# Altium PCB ESP32_RelayControl.pcbdoc (part 2 of 2)
Units mil, origin at the board's own origin, x right, y up, seen from the top; angles counter-clockwise.
Board outline 4712.62 x 5124.54 mil, 4 copper layers (Top Layer, GND, Power, Bottom Layer); 107 components, 102 nets, 393 pads, 226 vias.
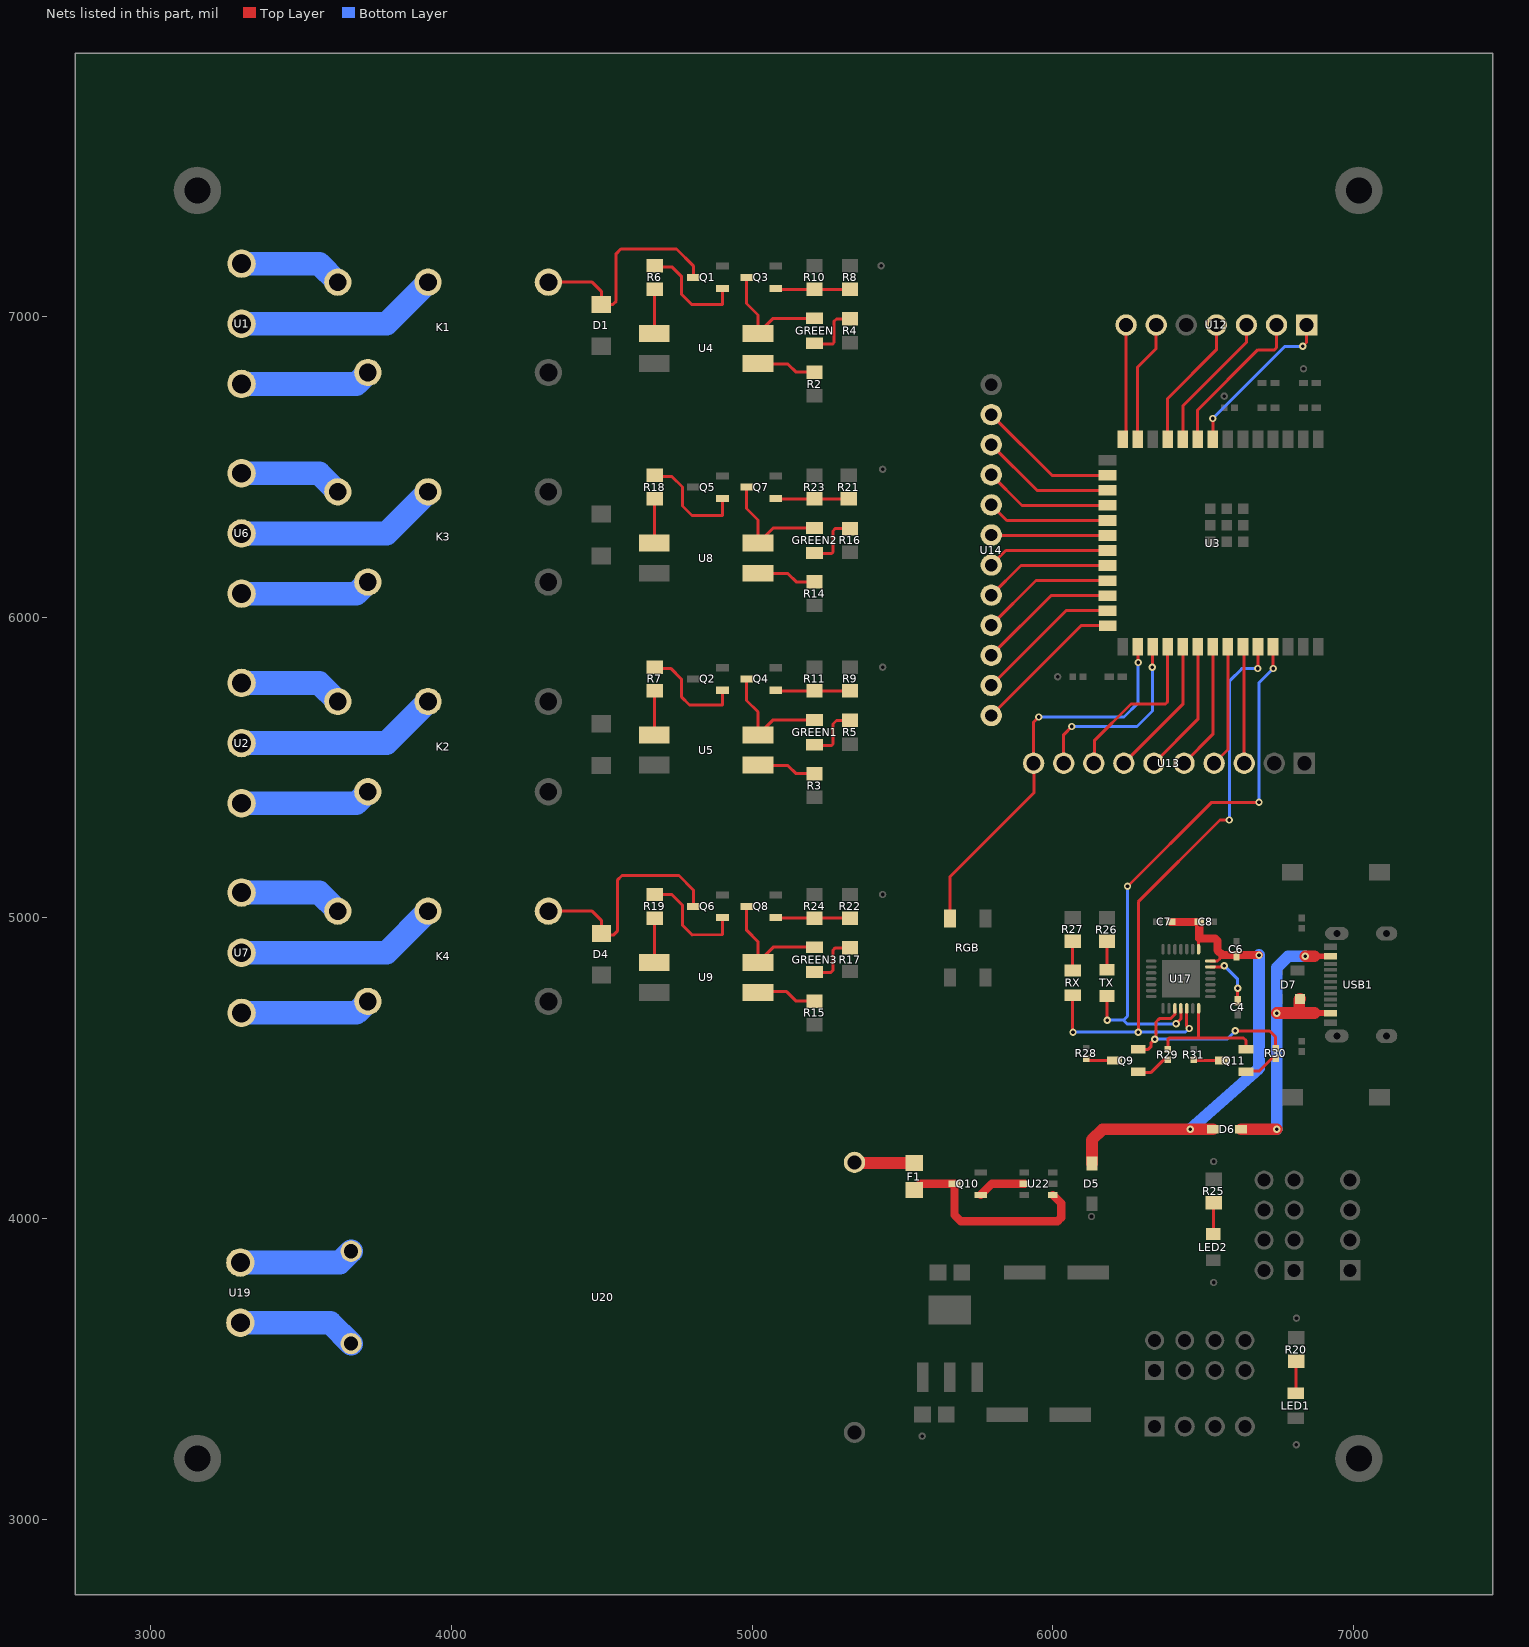
[diagram p4: the nets of this part, all layers, seen from the top]

## Via types
v1: diameter 24.41, hole 12.2, Top Layer to Bottom Layer, 140 vias
v2: diameter 24.02, hole 12.01, Top Layer to Bottom Layer, 86 vias

## Nets (pads, with @x,y where several pads share a name; then routed paths per layer and width w, separated by ;. In a path a pad name is that pad's centre, name@x,y a point inside that pad or via, vN(x,y) a via of type N, cw(c..) or ccw(c..) an arc to the next point about the centre after c; other vN are vias at no path point) (continued)
GPIO9: U3.17 U14.3 | length 448.8
  Top Layer w10: U14.3@5795.27,6572.96 5946.95,6421.29 U3.17@6181.29,6421.28
GPIO10: U3.18 U14.4 | length 428.1
  Top Layer w10: U14.4@5795.27,6472.96 5896.95,6371.29 U3.18@6181.29,6371.28
GPIO11: U3.19 U14.5 | length 407.4
  Top Layer w10: U14.5@5795.27,6372.96 5846.95,6321.29 U3.19@6181.29,6321.28
GPIO12: U3.20 U14.6 | length 386.7
  Top Layer w10: U14.6@5795.27,6272.96 5796.95,6271.29 U3.20@6181.29,6271.28
GPIO13: U3.21 U14.7 | length 406
  Top Layer w10: U14.7@5795.27,6172.96 5843.59,6221.29 U3.21@6181.29,6221.28
GPIO14: U3.22 U14.8 | length 426.7
  Top Layer w10: U14.8@5795.27,6072.96 5893.59,6171.29 U3.22@6181.29,6171.28
GPIO15: U3.8 U12.1 | length 544.1
  Top Layer w10: v1(6531.49,6659.97) 6531.49,6590.96 U3.8@6531.68,6590.77 ; v1(6830.7,6900.12) 6843.3,6912.73 U12.1@6843.3,6970.99
  Bottom Layer w10: v1(6531.49,6659.97) 6771.65,6900.13 v1(6830.7,6900.12)
GPIO16: U3.9 U12.2 | length 522
  Top Layer w10: U3.9@6481.68,6590.77 6480.31,6592.14 6480.31,6687.53 6681.1,6888.32 6736.21,6888.32 6743.3,6895.4 U12.2@6743.3,6970.99
GPIO17: U3.10 U12.3 | length 467.9
  Top Layer w10: U3.10@6431.68,6590.77 6431.68,6701.89 6643.3,6913.51 U12.3@6643.3,6970.99
GPIO18: U3.11 U12.4 | length 447.2
  Top Layer w10: U3.11@6381.68,6590.77 6381.68,6726.7 6543.3,6888.32 U12.4@6543.3,6970.99
GPIO19: U3.13 U12.6 | length 405.8
  Top Layer w10: U3.13@6281.68,6590.77 6281.68,6831.42 6343.3,6893.04 U12.6@6343.3,6970.99
GPIO20: U3.14 U12.7 | length 385
  Top Layer w10: U3.14@6231.68,6590.77 6243.3,6602.39 U12.7@6243.3,6970.99
GPIO21: U3.23 U14.9 | length 447.5
  Top Layer w10: U14.9@5795.27,5972.96 5943.59,6121.29 U3.23@6181.29,6121.28
GPIO35: RGB.4 U3.28 U13.10 | length 1330.3
  Top Layer w10: RGB.4@5657.48,4998.55 5657.48,5136.36 5937,5415.88 5937,5513.12 U13.10@5935.82,5514.3 5935.82,5650.92 v1(5952.75,5667.84) ; U3.28@6281.68,5901.79 6283.46,5900.02 v1(6283.46,5848.94)
  Bottom Layer w10: v1(5952.75,5667.84) 6236.21,5667.85 6283.46,5715.09 v1(6283.46,5848.94)
GPIO36: U3.29 U13.9 | length 636.9
  Top Layer w10: U13.9@6035.82,5514.3 6035.82,5609.19 v1(6062.99,5636.35) ; v1(6330.7,5833.2) 6330.7,5900.82 U3.29@6331.68,5901.79
  Bottom Layer w10: v1(6062.99,5636.35) 6279.52,5636.35 6330.7,5687.53 v1(6330.7,5833.2)
GPIO37: U3.30 U13.8 | length 556.2
  Top Layer w10: U13.8@6135.82,5514.3 6137.79,5516.27 6137.79,5589.11 6259.84,5711.15 6374.01,5711.15 6381.68,5718.83 U3.30@6381.68,5901.79
GPIO38: U3.31 U13.7 | length 468.6
  Top Layer w10: U13.7@6235.82,5514.3 6431.68,5710.16 U3.31@6431.68,5901.79
GPIO39: U3.32 U13.6 | length 447.9
  Top Layer w10: U13.6@6335.82,5514.3 6481.68,5660.16 U3.32@6481.68,5901.79
GPIO40: U3.33 U13.5 | length 427.2
  Top Layer w10: U13.5@6435.82,5514.3 6531.68,5610.16 U3.33@6531.68,5901.79
GPIO41: U3.34 U13.4 | length 406.5
  Top Layer w10: U13.4@6535.82,5514.3 6581.68,5560.16 U3.34@6581.68,5901.79
GPIO42: U3.35 U13.3 | length 389.2
  Top Layer w10: U3.35@6631.68,5901.79 6635.82,5897.66 U13.3@6635.82,5514.3
GPIO45: U3.26 U14.12 | length 510.8
  Top Layer w10: U14.12@5795.27,5672.96 6093.59,5971.29 U3.26@6182.47,5971.28
GPIO46: U3.16 U14.2 | length 469.6
  Top Layer w10: U14.2@5795.27,6672.96 5996.95,6471.29 U3.16@6181.29,6471.28
GPIO47: U3.24 U14.10 | length 468.2
  Top Layer w10: U14.10@5795.27,5872.96 5993.59,6071.29 U3.24@6181.29,6071.28
GPIO48: U3.25 U14.11 | length 488.9
  Top Layer w10: U14.11@5795.27,5772.96 6043.59,6021.29 U3.25@6181.29,6021.28
GREEN1_1: GREEN1.1 R5.1 | length 192.3
  Top Layer w10: GREEN1.1@5207.68,5575.81 5209.58,5573.91 5264.74,5573.91 5268.68,5577.85 5268.68,5644.78 5280.44,5656.53 R5.1@5325.73,5656.53
GREEN1_2: GREEN1.2 Q4.3 U5.2 | length 410.6
  Top Layer w10: Q4.3@4981.91,5794.36 4981.91,5722.89 5019.86,5684.93 U5.2@5019.86,5608.16 5070.21,5658.51 GREEN1.2@5207.68,5658.51
GREEN2_1: GREEN2.1 R16.1 | length 194.6
  Top Layer w10: GREEN2.1@5207.68,6213.6 5209.58,6211.7 5264.74,6211.7 5268.68,6215.64 5268.68,6286.51 5276.5,6294.32 R16.1@5325.73,6294.32
GREEN2_2: GREEN2.2 Q7.3 U8.2 | length 410.9
  Top Layer w10: Q7.3@4981.95,6432.13 4981.25,6361.33 5019.85,6322.74 5019.85,6245.93 5070.21,6296.3 GREEN2.2@5207.68,6296.3
K1_1: D1.2 K1.1 Q1.3 | length 768.3
  Top Layer w10: K1.1@4322.98,7113.16 4468.5,7113.15 4499,7082.65 D1.2@4499,7039.17 4537.1,7039.17 4548.21,7050.28 4548.21,7207.76 4563.96,7223.51 4749,7223.51 4804.71,7167.8 Q1.3@4804.71,7129
K1_2: K1.2 U1.2 | length 677.1
  Bottom Layer w78.74: U1.2@3303.15,6974.94 3784.74,6974.93 K1.2@3922.98,7113.16
K1_3: K1.3 U1.3 | length 345.4
  Bottom Layer w78.74: U1.3@3303.15,7174.94 3561.2,7174.93 K1.3@3622.98,7113.16
K1_4: K1.4 U1.1 | length 435.7
  Bottom Layer w78.74: U1.1@3303.15,6774.94 3684.74,6774.93 K1.4@3722.98,6813.16
K2_2: K2.2 U2.2 | length 677
  Bottom Layer w78.74: U2.2@3303.15,5581.24 3784.71,5581.23 K2.2@3922.94,5719.46
K2_3: K2.3 U2.3 | length 345.4
  Bottom Layer w78.74: U2.3@3303.15,5781.24 3561.17,5781.23 K2.3@3622.94,5719.46
K2_4: K2.4 U2.1 | length 435.6
  Bottom Layer w78.74: U2.1@3303.15,5381.24 3684.71,5381.23 K2.4@3722.94,5419.46
K3_2: K3.2 U6.2 | length 677
  Bottom Layer w78.74: U6.2@3303.15,6278.09 3784.71,6278.08 K3.2@3922.94,6416.31
K3_3: K3.3 U6.3 | length 345.4
  Bottom Layer w78.74: U6.3@3303.15,6478.09 3561.17,6478.08 K3.3@3622.94,6416.31
K3_4: K3.4 U6.1 | length 435.6
  Bottom Layer w78.74: U6.1@3303.15,6078.09 3684.71,6078.08 K3.4@3722.94,6116.31
K4_1: D4.2 K4.1 Q6.3 | length 794.8
  Top Layer w10: K4.1@4322.98,5022.62 4468.5,5022.61 4499.06,4992.05 ; 4499.06,4991.66 4499.06,4948.27 D4.2@4503.74,4943.59 ; D4.2@4503.74,4943.99 4540.34,4943.99 4552.15,4955.8 4552.15,5125.09 4567.9,5140.84 4756.87,5140.84 4804.74,5092.97 Q6.3@4804.74,5038.5
K4_2: K4.2 U7.2 | length 677.1
  Bottom Layer w78.74: U7.2@3303.15,4884.39 3784.74,4884.38 K4.2@3922.98,5022.62
K4_3: K4.3 U7.3 | length 345.4
  Bottom Layer w78.74: U7.3@3303.15,5084.39 3561.2,5084.38 K4.3@3622.98,5022.62
K4_4: K4.4 U7.1 | length 435.7
  Bottom Layer w78.74: U7.1@3303.15,4684.39 3684.74,4684.38 K4.4@3722.98,4722.62
LED2_2: LED2.2 R25.2 | length 104.5
  Top Layer w10: LED2.2@6533.21,3948.92 6533.21,4051.34 R25.2@6534.68,4052.8
Q1_1: Q1.1 R6.1 | length 366.7
  Top Layer w10: R6.1@4676.15,7168.36 4680.05,7164.46 4733.25,7164.46 4764.75,7132.96 4764.75,7073.86 4800.15,7038.46 4901.95,7039.06 Q1.1@4901.96,7091.6
Q3_1: Q3.1 R8.1 R10.2 | length 247.4
  Top Layer w10: Q3.1@5079.13,7091.6 5081.09,7089.63 R10.2@5207.63,7089.63 R8.1@5325.73,7089.63
Q6_1: Q6.1 R19.1 | length 377
  Top Layer w10: R19.1@4676.16,5077.85 4733.25,5077.8 4768.65,5042.4 4768.65,4975.5 4800.15,4944 4901.95,4944.5 Q6.1@4901.99,5001.1
Q8_1: Q8.1 R22.1 R24.2 | length 247.4
  Top Layer w10: Q8.1@5079.19,5001.07 5081.16,4999.11 R24.2@5207.66,4999.11 R22.1@5325.76,4999.1
Q9_1: Q9.1 R29.2 | length 116.6
  Top Layer w10: Q9.1@6283.46,4488.69 6285.4,4486.75 6326.77,4486.75 6368.78,4528.76 R29.2@6381.88,4528.76
Q9_3: Q9.3 R28.1 | length 97.2
  Top Layer w10: R28.1@6110.23,4532.69 6116.84,4526.09 Q9.3@6204.72,4526.09
Q11_1: Q11.1 R30.2 | length 116.7
  Top Layer w10: Q11.1@6641.72,4488.69 6643.72,4490.68 6685.03,4490.68 6727.1,4532.75 R30.2@6740.15,4532.74
Q11_3: Q11.3 R31.1 | length 95.6
  Top Layer w10: R31.1@6468.5,4528.76 6471.16,4526.09 Q11.3@6562.98,4526.09
R3_1: R3.1 U5.1 | length 199.7
  Top Layer w10: U5.1@5019.86,5508.16 5021.04,5506.98 5119.07,5506.98 5146.62,5479.43 R3.1@5207.63,5479.43
R4_1: GREEN.1 R4.1 | length 194.6
  Top Layer w10: GREEN.1@5207.66,6910.49 5209.61,6908.55 5268.68,6908.55 5272.62,6912.49 5272.62,6983.36 5280.44,6991.17 R4.1@5325.73,6991.17
R7_1: Q2.1 R7.1 | length 361.2
  Top Layer w10: R7.1@4676.15,5833.73 4680.05,5829.83 4729.35,5829.83 4764.75,5794.42 4764.75,5735.33 4792.35,5707.73 4901.95,5708.33 Q2.1@4901.95,5756.92
R7_2: R7.2 U5.3 | length 147.4
  Top Layer w10: U5.3@4674.95,5607.73 R7.2@4674.95,5753.43 ; R7.2@4674.95,5753.83 R7.2@4676.15,5755.03
R11_2: Q4.1 R9.1 R11.2 | length 247.4
  Top Layer w10: Q4.1@5079.16,5756.96 5081.13,5754.99 R11.2@5207.63,5754.99 R9.1@5325.73,5754.99
R14_1: R14.1 U8.1 | length 199.7
  Top Layer w10: U8.1@5019.86,6145.95 5021.04,6144.77 5119.07,6144.77 5146.62,6117.22 R14.1@5207.63,6117.22
R17_1: GREEN3.1 R17.1 | length 192.4
  Top Layer w10: GREEN3.1@5207.69,4819.99 5209.68,4818 5260.81,4818 5268.68,4825.88 5268.68,4892.81 5276.62,4900.75 R17.1@5325.76,4900.75
R18_1: Q5.1 R18.1 | length 374.6
  Top Layer w10: R18.1@4676.15,6471.53 4680.05,6467.64 4733.25,6467.64 4768.65,6432.13 4768.65,6369.13 4800.15,6337.74 4901.95,6338.23 Q5.1@4901.96,6394.75
R18_2: R18.2 U8.3 | length 147.3
  Top Layer w10: U8.3@4674.98,6245.95 4674.98,6391.64 R18.2@4676.13,6392.78
R20_2: LED1.1 R20.2 | length 106.5
  Top Layer w10: LED1.1@6807.23,3419.98 6807.23,3524.3 R20.2@6808.76,3525.84
R23_2: Q7.1 R21.1 R23.2 | length 243.5
  Top Layer w10: Q7.1@5079.16,6394.75 5081.13,6392.78 R23.2@5207.63,6392.78 R21.1@5321.83,6392.78
RX_1: R27.2 RX.1 | length 96.5
  Top Layer w10: RX.1@6065.52,4825.75 R27.2@6065.5,4922.24
TX_2: R26.2 TX.2 | length 94.5
  Top Layer w10: TX.2@6179.71,4827.66 R26.2@6179.69,4922.2
U4_1: R2.1 U4.1 | length 199.7
  Top Layer w10: U4.1@5019.86,6842.8 5021.04,6841.62 5119.07,6841.62 5146.62,6814.07 R2.1@5207.63,6814.07
U4_2: GREEN.2 Q3.3 U4.2 | length 410.6
  Top Layer w10: Q3.3@4981.88,7129 4981.88,7042.41 5019.86,7004.42 U4.2@5019.86,6942.8 5070.25,6993.19 GREEN.2@5207.66,6993.19
U4_3: R6.2 U4.3 | length 147.3
  Top Layer w10: U4.3@4674.98,6942.8 4674.98,7088.49 R6.2@4676.13,7089.63
U9_1: R15.1 U9.1 | length 202
  Top Layer w10: U9.1@5019.86,4752.25 5022.62,4755.01 5115.14,4755.01 5146.6,4723.54 R15.1@5207.66,4723.55
U9_2: GREEN3.2 Q8.3 U9.2 | length 410.6
  Top Layer w10: Q8.3@4981.95,5038.49 4981.95,4959.1 5019.85,4921.19 U9.2@5019.86,4852.25 ; U9.2@5019.86,4852.25 5070.29,4902.69 GREEN3.2@5207.69,4902.69
U9_3: R19.2 U9.3 | length 147.3
  Top Layer w10: U9.3@4674.98,4852.25 4674.98,4997.93 R19.2@4676.16,4999.11
U17_6: C4.2 U17.6 | length 182.5
  Top Layer w10: U17.6@6523.59,4837.14 6565.74,4837.14 v1(6569.68,4841.07) ; C4.2@6614.17,4724.69 v1(6614.17,4766.27)
  Bottom Layer w10: v1(6569.68,4841.07) 6614.16,4796.59 v1(6614.17,4766.27)
U19_1: U19.1 U20.2 | length 392.9
  Bottom Layer w78.74: U19.1@3303.15,3654.46 3598.03,3654.46 U20.2@3667.32,3585.17
U19_2: U19.2 U20.1 | length 379.8
  Bottom Layer w78.74: U19.2@3303.15,3854.47 3629.52,3854.47 U20.1@3667.32,3892.26
U20_3: F1.1 U20.3 | length 199.8
  Top Layer w39.37: U20.3@5340.55,4187.53 5342.82,4185.27 F1.1@5539.37,4185.27
U22_1: F1.2 Q10.3 U22.1 | length 702.1
  Top Layer w27.56: F1.2@5539.37,4095.31 5560.73,4116.66 Q10.3@5673.17,4116.66 5673.17,4012.39 5694.09,3991.47 6015.35,3991.47 6027.55,4003.68 6027.55,4051.71 U22.1@5999.95,4079.31
U22_5: Q10.1 U22.5 | length 161.1
  Top Layer w27.56: Q10.1@5759.89,4079.26 5797.34,4116.71 U22.5@5905.46,4116.71
UORXD: RX.2 U3.36 U17.26 | length 2082.3
  Top Layer w10: RX.2@6065.52,4743.05 6065.52,4622.01 v1(6066.92,4620.6) ; v1(6283.74,4620.6) 6283.74,5053.56 6555.5,5325.33 v1(6586.61,5325.32) ; U17.26@6444.87,4699.32 6444.87,4640.3 v1(6452.75,4632.41) ; v1(6681.1,5829.26) 6681.1,5901.22 U3.36@6681.68,5901.79
  Bottom Layer w10: v1(6066.92,4620.6) v1(6283.74,4620.6) 6440.94,4620.6 v1@6452.75,4632.42 ; v1(6586.61,5325.32) 6586.61,5786.35 6629.52,5829.26 ; 6626.37,5829.26 6629.52,5829.26 ; v1(6681.1,5829.26) 6630.31,5829.26 6630.11,5829.46 ; 6629.52,5829.26 6630.11,5829.46 ; 6629.52,5829.26 6629.91,5829.26 6630.11,5829.46
UOTXD: TX.1 U3.37 U17.25 | length 1912.9
  Top Layer w10: TX.1@6179.71,4741.04 6179.71,4661.37 v1(6181.1,4659.97) ; v1(6248.03,5104.85) 6527.55,5384.38 v1(6685.03,5384.38) ; v1(6409.44,4648.16) 6425.17,4663.9 U17.25@6425.17,4699.32 ; U3.37@6731.68,5901.79 v1@6732.3,5829.21
  Bottom Layer w10: v1(6181.1,4659.97) 6234.45,4659.98 ; v1(6248.03,5104.85) 6248.02,4673.55 6234.45,4659.98 ; v1(6409.44,4648.16) 6246.26,4648.16 6234.45,4659.98 ; v1(6685.03,5384.38) 6685.03,5782.02 v1(6732.28,5829.26)
USB_DTR: Q11.2 R29.1 U17.28 | length 426.9
  Top Layer w10: R29.1@6381.88,4562.85 6381.88,4596.98 6385.82,4600.92 ; 6385.82,4600.53 6484.2,4600.53 ; U17.28@6484.3,4698.95 6484.2,4600.53 ; 6633.85,4600.53 6484.2,4600.53 ; 6633.85,4600.92 6641.73,4593.05 Q11.2@6641.72,4563.49
USB_RTS: Q9.2 R30.1 U17.24 | length 687
  Top Layer w10: Q9.2@6283.46,4563.49 6316.9,4563.49 6326.77,4573.36 6326.77,4585.17 v1(6338.58,4596.98) 6342.51,4600.92 6342.51,4654.06 6353.54,4665.09 6390.93,4665.09 6405.47,4679.63 U17.24@6405.47,4699.32 ; v1(6606.29,4624.54) 6720.47,4624.54 6740.15,4604.86 R30.1@6740.15,4566.82
  Bottom Layer w10: v1(6338.58,4596.98) 6578.73,4596.98 v1(6606.29,4624.54)
VBUS: D6.2 D7.4 USB1.2 USB1.11 | length 1076.3
  Top Layer w19.68: 6870.07,4683.6 USB1.2@6922.23,4683.6 ; 6870.1,4872.61 USB1.11@6922.23,4872.58
  Top Layer w39.37: D6.2@6624.9,4297.77 v1(6744.09,4297.77) ; v1(6744.09,4683.6) 6818.65,4683.6 6818.89,4683.36 ; 6818.89,4683.2 6818.89,4683.36 ; 6818.89,4683.59 6870.07,4683.6 ; D7.4@6818.89,4728.46 6818.89,4683.36 ; D7.4@6818.89,4729.24 D7.4@6820.86,4731.21 ; v1(6838.58,4872.57) 6870.07,4872.57
  Bottom Layer w39.37: v1(6744.09,4297.77) v1(6744.09,4683.6) 6744.09,4834.78 6781.92,4872.61 v1(6838.58,4872.57)
VDDUSB: C6.2 C7.2 C8.2 D5.2 D6.1 U17.7 U17.8 | length 1639.1
  Top Layer w10: 6484.24,4923.75 U17.8@6484.27,4896.17 ; U17.7@6523.59,4856.84 6547.2,4856.81 6555.1,4864.61 6555.1,4872.61
  Top Layer w27.56: C7.2@6391.53,4986.7 C8.2@6486.42,4986.7 6486.41,4931.63 6539.36,4931.63 6547.24,4923.75 6547.24,4892.26 6562.98,4876.51 6608.41,4876.51 C6.2@6610.23,4874.69 6612.06,4876.51 v1(6685.03,4876.51)
  Top Layer w39.37: D5.2@6129.92,4183.59 6129.91,4262.34 6165.35,4297.77 v1(6456.69,4297.77) D6.1@6532.57,4297.77
  Bottom Layer w39.37: v1(6456.69,4297.77) 6685.03,4500.3 v1(6685.03,4876.51)
pads on no net: RGB.2 U17.1 U17.2 U17.9 U17.10 U17.11 U17.12 U17.13 U17.14 U17.15 U17.16 U17.17 U17.18 U17.19 U17.20 U17.21 U17.22 U17.23 U17.27 U17.29 U21.2 U22.4 USB1.3 USB1.9 USB1.13 USB1.14 USB1.15 USB1.16
copper on no net:
  other v1: 3156.3,3142.26 7016.92,3142.26 3113.15,3160.13 3199.45,3160.13 6973.77,3160.13 7060.07,3160.13 3095.28,3203.28 3217.32,3203.28 6955.9,3203.28 7077.94,3203.28 3113.15,3246.43 3199.45,3246.43 6973.77,3246.43 7060.07,3246.43 3156.3,3264.3 7016.92,3264.3 6550.19,6250.21 6605.31,6250.21 6522.63,6277.77 6577.75,6277.77 6632.87,6277.77 6550.19,6305.33 6605.31,6305.33 6522.63,6332.89 6577.75,6332.89 6632.87,6332.89 6550.19,6360.45 6605.31,6360.45 3156.3,7357.21 7016.92,7357.21 3113.15,7375.08 3199.45,7375.08 6973.77,7375.08 7060.07,7375.08 3095.28,7418.23 3217.32,7418.23 6955.9,7418.23 7077.94,7418.23 3113.15,7461.38 3199.45,7461.38 6973.77,7461.38 7060.07,7461.38 3156.3,7479.25 7016.92,7479.25

## Polygon pours and split planes (outlines as drawn)
GND on GND (solid): 7204.72,3034.08 4394.98,3034.08 4394.98,7624.54 7204.72,7624.54
+5V on Power (solid): 4396.46,4328.48 4396.46,7623.2 4764.69,7623.2 4766.53,4470.21 4766.53,4419.03 6179.92,4419.03 6179.52,3966.67 5835.43,3967.46 5490.55,3966.67 5487.79,3963.91 5487.01,3576.51 5597.24,3576.51 5597.24,3269.43 5762.6,3269.43 5766.53,3273.36 5766.53,3375.73 5762.6,3379.66 5935.82,3379.66 5935.82,3174.94 5931.89,3171 6250.78,3171 6251.96,3709.19 6883.85,3705.65 6880.09,3033.98 5439.76,3033.98 5439.76,4324.54 5435.82,4328.48
GND on Top Layer (solid, pour order 4): 6488.18,6396.19 6665.35,6396.19 6665.35,6305.64 6665.35,6219.03 6578.73,6219.03 6488.18,6219.03 6488.18,6301.7
3V3 on Power (solid): 7204.84,3746.59 6169.28,3746.59 6169.28,3628.48 5519.68,3628.48 5519.68,3939.5 6216.53,3935.57 6216.53,4459.19 5082.67,4459.19 5082.67,7624.54 7204.72,7624.54 7204.72,6400.13 6483.56,6400.13 6483.56,6214.24 7204.84,6214.24

## Keep-outs
Board Outline Layer:
  lines w10: 3000,3204.46 ccw(c3157.48,3204.46) 3157.48,3046.98 7015.75,3046.98 ccw(c7015.75,3204.46) 7173.23,3204.46 7173.23,5300.68 6938.01,5300.68 6938.01,7191.44 7173.23,7191.44 7173.23,7417.06 ccw(c7015.75,7417.06) 7015.75,7574.54 3157.48,7574.54 ccw(c3157.48,7417.06) 3000,7417.06 3000,3204.46
Multi-Layer:
  region: 3098.22,3774.15 3909.24,3772.18 3909.14,3732.81 3098.12,3734.78
  region: 3090.55,6860.76 3421.07,6860.76 3469.39,6909.08 3476.35,6911.96 3716.45,6911.96 3721.51,6910.56 3839.7,6839.69 3844.49,6831.25 3844.49,6717.07 3824.8,6717.07 3824.8,6825.67 3713.73,6892.27 3480.43,6892.27 3432.11,6843.96 3425.15,6841.07 3090.55,6841.07
  region: 3090.55,7108.79 3425.15,7108.79 3432.11,7105.91 3480.43,7057.59 3712.37,7057.59 3765.71,7110.92 3765.71,7205.25 3785.39,7205.25 3785.39,7106.85 3782.51,7099.89 3723.41,7040.79 3716.45,7037.9 3476.35,7037.9 3469.39,7040.79 3421.07,7089.1 3090.55,7089.1
  region: 3090.55,5715.09 3425.15,5715.09 3432.11,5712.21 3480.43,5663.89 3712.37,5663.89 3765.71,5717.23 3765.71,5811.55 3785.39,5811.55 3785.39,5713.15 3782.51,5706.19 3723.41,5647.09 3716.45,5644.21 3476.35,5644.21 3469.39,5647.09 3421.07,5695.41 3090.55,5695.41
  region: 3090.55,5467.06 3421.07,5467.06 3469.39,5515.38 3476.35,5518.26 3716.45,5518.26 3721.51,5516.86 3839.7,5445.99 3844.49,5437.55 3844.49,5323.38 3824.8,5323.38 3824.8,5431.97 3713.73,5498.58 3480.43,5498.58 3432.11,5450.26 3425.15,5447.38 3090.55,5447.38
  region: 3090.55,6411.94 3425.15,6411.94 3432.11,6409.06 3480.43,6360.74 3712.37,6360.74 3765.71,6414.08 3765.71,6508.4 3785.39,6508.4 3785.39,6410 3782.51,6403.04 3723.41,6343.94 3716.45,6341.06 3476.35,6341.06 3469.39,6343.94 3421.07,6392.26 3090.55,6392.26
  region: 3090.55,6163.91 3421.07,6163.91 3469.39,6212.23 3476.35,6215.11 3716.45,6215.11 3721.51,6213.71 3839.7,6142.84 3844.49,6134.4 3844.49,6020.23 3824.8,6020.23 3824.8,6128.82 3713.73,6195.42 3480.43,6195.42 3432.11,6147.11 3425.15,6144.22 3090.55,6144.22
  region: 3090.55,5018.24 3425.15,5018.24 3432.11,5015.36 3480.43,4967.04 3712.37,4967.04 3765.71,5020.38 3765.71,5114.7 3785.39,5114.7 3785.39,5016.3 3782.51,5009.34 3723.41,4950.24 3716.45,4947.36 3476.35,4947.36 3469.39,4950.24 3421.07,4998.56 3090.55,4998.56
  region: 3090.55,4770.21 3421.07,4770.21 3469.39,4818.53 3476.35,4821.41 3716.45,4821.41 3721.51,4820.01 3839.7,4749.14 3844.49,4740.7 3844.49,4626.53 3824.8,4626.53 3824.8,4735.13 3713.73,4801.73 3480.43,4801.73 3432.11,4753.41 3425.15,4750.53 3090.55,4750.53
  region: 3031.5,4445.02 4360.28,4445.02 4360.45,4425.33 3031.5,4425.33
  circle w10: c6964.37,4664.3 r13.78
  circle w10: c6964.37,4891.86 r13.78

## Silkscreen, mask and mechanical layers (free items; w line width, h text height)
Top Silkscreen Layer:
  region: 7060.62,3986.22 7064.56,3986.22 7064.56,4182.42 7060.62,4182.42
  region: 7054.72,3986.22 7064.56,3986.22 7064.56,3990.16 7054.72,3990.16
  region: 7054.7,4178.48 7064.54,4178.48 7064.54,4182.42 7054.7,4182.42
  region: 6626.56,4188.87 6622.62,4188.87 6622.62,3768.87 6626.56,3768.87
  region: 6632.47,4188.78 6622.62,4188.78 6622.62,4184.85 6632.47,4184.85
  region: 6632.48,3772.9 6622.64,3772.9 6622.64,3768.97 6632.48,3768.97
  region: 6698.1,3664.11 6698.1,3673.95 6694.16,3673.95 6694.16,3664.11
  region: 6698.19,3670.01 6698.19,3673.95 6278.19,3673.95 6278.19,3670.01
  region: 6282.22,3664.09 6282.22,3673.94 6278.28,3673.94 6278.28,3664.09
  region: 6278.28,3425.91 6278.28,3416.06 6282.22,3416.06 6282.22,3425.91
  region: 6278.19,3420 6278.19,3416.06 6698.19,3416.06 6698.19,3420
  region: 6694.16,3425.92 6694.16,3416.08 6698.1,3416.08 6698.1,3425.92
  region: 7054.13,3967.91 7063.97,3967.91 7063.97,3971.85 7054.13,3971.85
  region: 7054.14,3775.65 7063.99,3775.65 7063.99,3779.59 7054.14,3779.59
  region: 7060.05,3775.65 7063.99,3775.65 7063.99,3971.85 7060.05,3971.85
  region: 6868.59,3768.97 6878.44,3768.97 6878.44,3772.9 6868.59,3772.9
  region: 6874.5,3768.87 6878.44,3768.87 6878.44,4188.87 6874.5,4188.87
  region: 6868.58,4184.85 6878.42,4184.85 6878.42,4188.78 6868.58,4188.78
  region: 6687.64,3244.53 6687.64,3234.69 6691.57,3234.69 6691.57,3244.53
  region: 6495.38,3244.52 6495.38,3234.67 6499.32,3234.67 6499.32,3244.52
  region: 6495.38,3238.61 6495.38,3234.67 6691.57,3234.67 6691.57,3238.61
  region: 6477.07,3245.1 6477.07,3235.26 6481,3235.26 6481,3245.1
  region: 6284.81,3245.09 6284.81,3235.25 6288.74,3235.25 6288.74,3245.09
  region: 6284.81,3239.18 6284.81,3235.25 6481,3235.25 6481,3239.18
  lines w10: 3827.85,7348.95 5244.11,7348.95 5244.11,7524.68 3827.85,7524.68 3827.85,7348.95 ; 5264.02,7363.26 6354.35,7363.26 6354.35,7510.36 5264.02,7510.36 5264.02,7363.26
  text "(Naren Subburaj)" at 6071.37,7428.76 h18.84
  text "designed by" at 5267.04,7423.05 h37.68
  text "ESP32 RELAY BOARD" at 3800.29,7399.84 h75.35
  text "v1.0" at 5116.67,7397.91 h37.68
  text "N0" at 3049.35,7219.58 h37.68 r270
  text "RELAY1 - GPIO4" at 3801.1,7185.72 h37.68
  text "GPIO20" at 6250.9,7040.68 h18.84 r90
  text "GPIO19" at 6350.63,7040.72 h18.84 r90
  text "GPIO08" at 6450.38,7040.74 h18.84 r90
  text "GPIO18" at 6550.14,7040.7 h18.84 r90
  text "GPIO17" at 6649.85,7040.68 h18.84 r90
  text "GPIO16" at 6749.64,7040.72 h18.84 r90
  text "GPIO15" at 6849.32,7040.68 h18.84 r90
  text "COM" at 3049.37,7027.12 h37.68 r270
  text "NC" at 3049.35,6790.45 h37.68 r270
  text "GPIO03" at 5625.63,6768.64 h18.84
  text "GPIO46" at 5625.7,6668.28 h18.84
  text "ESP32-S3-WROOM-1(N8R8)" at 6083.73,6605.72 h18.84 r270
  text "GPIO09" at 5626.52,6567.99 h18.84
  text "N0" at 3049.35,6522.73 h37.68 r270
  text "RELAY2 - GPIO5" at 3801.1,6488.87 h37.68
  text "GPIO10" at 5633.68,6467.6 h18.84
  text "GPIO11" at 5641.77,6367.26 h18.84
  text "COM" at 3049.37,6330.27 h37.68 r270
  text "GPIO12" at 5633.7,6266.94 h18.84
  text "GPIO13" at 5633.76,6166.62 h18.84
  text "NC" at 3049.35,6093.6 h37.68 r270
  text "GPIO14" at 5632.86,6066.25 h18.84
  text "GPIO21" at 5633.72,5965.96 h18.84
  text "GPIO47" at 5624.81,5865.61 h18.84
  text "N0" at 3049.35,5825.88 h37.68 r270
  text "RELAY3 - GPIO6" at 3801.1,5792.02 h37.68
  text "GPIO48" at 5624.73,5765.29 h18.84
  text "GPIO45" at 5624.8,5664.97 h18.84
  text "COM" at 3049.37,5633.42 h37.68 r270
  text "NC" at 3049.35,5396.75 h37.68 r270
  text "GPI01" at 6845.39,5375.55 h18.84 r90
  text "GPIO2" at 6745.15,5365.73 h18.84 r90
  text "GPIO41" at 6544.77,5354.24 h18.84 r90
  text "GPIO35" at 5943.81,5347.77 h18.84 r90
  text "GPIO36" at 6044.05,5347.99 h18.84 r90
  text "GPIO39" at 6344.55,5347.98 h18.84 r90
  text "GPIO37" at 6144.25,5347.04 h18.84 r90
  text "GPIO38" at 6244.42,5347.05 h18.84 r90
  text "GPIO40" at 6444.65,5346.15 h18.84 r90
  text "GPIO42" at 6644.98,5346.19 h18.84 r90
  text "RESET" at 6854.57,5244.78 h37.68
  text "N0" at 3049.35,5129.03 h37.68 r270
  text "RELAY4 - GPIO7" at 3801.1,5095.17 h37.68
  text "COM" at 3049.37,4936.57 h37.68 r270
  text "RGB LED" at 5592.36,4786.52 h37.68 r90
  text "TXD" at 6277.4,4726.48 h37.68 r90
  text "RXD" at 6001.81,4724.33 h37.68 r90
  text "NC" at 3049.35,4699.9 h37.68 r270
  text "BOOT" at 6868.06,4272.34 h37.68
  text "GND" at 7127.79,4031.92 h37.68 r90
  text "AC INPUT" at 3055.32,3986.15 h63.88
  text "GND" at 6609.17,3954.75 h18.84 r90
  text "3V3" at 6912.31,3950.82 h18.84 r90
  text "L" at 3049.44,3864.7 h37.37 r270
  text "3V3" at 6478.18,3851.88 h37.68 r90
  text "3V3" at 7127.77,3822.35 h37.68 r90
  text "GND" at 6464.5,3688.6 h18.84
  text "3V3" at 5754.89,3662.1 h37.68
  text "N" at 3049.52,3659.98 h37.37 r270
  text "5V" at 5517.55,3446.82 h37.68 r90
  text "5V" at 6473.52,3385.45 h18.84
  text "5V" at 6903.38,3340.75 h37.68 r90
  text "5V" at 6350.51,3169.99 h37.68
  text "GND" at 6541.23,3169.98 h37.68
Mechanical Layer:
  lines w1: 3031.5,4425.33 4360.45,4425.33 ccw(c4360.27,4435.17) 4360.28,4445.02 3031.5,4445.02 ccw(c3033.71,4435.17) 3031.5,4425.33 ; 3090.55,4750.53 3425.15,4750.53 ccw(c3425.15,4760.37) 3432.11,4753.41 3480.43,4801.73 3713.73,4801.73 3824.8,4735.13 3824.8,4626.53 ccw(c3834.64,4626.53) 3844.49,4626.53 3844.49,4740.7 ccw(c3834.64,4740.7) 3839.71,4749.14 3721.51,4820.01 ccw(c3716.45,4811.57) 3716.45,4821.41 3476.35,4821.41 ccw(c3476.35,4811.57) 3469.39,4818.53 3421.07,4770.21 3090.55,4770.21 ccw(c3090.65,4760.37) 3090.55,4750.53 ; 3090.55,4998.56 3421.07,4998.56 3469.39,4950.24 ccw(c3476.35,4957.2) 3476.35,4947.36 3716.45,4947.36 ccw(c3716.45,4957.2) 3723.41,4950.24 3782.51,5009.34 ccw(c3775.55,5016.3) 3785.39,5016.3 3785.39,5114.7 ccw(c3775.55,5114.6) 3765.71,5114.7 3765.71,5020.38 3712.37,4967.04 3480.43,4967.04 3432.11,5015.36 ccw(c3425.15,5008.4) 3425.15,5018.24 3090.55,5018.24 ccw(c3090.65,5008.4) 3090.55,4998.56 ; 3090.55,5447.38 3425.15,5447.38 ccw(c3425.15,5457.22) 3432.11,5450.26 3480.43,5498.58 3713.73,5498.58 3824.8,5431.97 3824.8,5323.38 ccw(c3834.64,5323.38) 3844.49,5323.38 3844.49,5437.55 ccw(c3834.64,5437.55) 3839.71,5445.99 3721.51,5516.86 ccw(c3716.45,5508.42) 3716.45,5518.26 3476.35,5518.26 ccw(c3476.35,5508.42) 3469.39,5515.38 3421.07,5467.06 3090.55,5467.06 ccw(c3090.65,5457.22) 3090.55,5447.38 ; 3090.55,5695.41 3421.07,5695.41 3469.39,5647.09 ccw(c3476.35,5654.05) 3476.35,5644.21 3716.45,5644.21 ccw(c3716.45,5654.05) 3723.41,5647.09 3782.51,5706.19 ccw(c3775.55,5713.15) 3785.39,5713.15 3785.39,5811.55 ccw(c3775.55,5811.45) 3765.71,5811.55 3765.71,5717.23 3712.37,5663.89 3480.43,5663.89 3432.11,5712.21 ccw(c3425.15,5705.25) 3425.15,5715.09 3090.55,5715.09 ccw(c3090.65,5705.25) 3090.55,5695.41 ; 3090.55,6144.22 3425.15,6144.22 ccw(c3425.15,6154.07) 3432.11,6147.11 3480.43,6195.42 3713.73,6195.42 3824.8,6128.82 3824.8,6020.23 ccw(c3834.64,6020.23) 3844.49,6020.23 3844.49,6134.4 ccw(c3834.64,6134.4) 3839.71,6142.84 3721.51,6213.71 ccw(c3716.45,6205.27) 3716.45,6215.11 3476.35,6215.11 ccw(c3476.35,6205.27) 3469.39,6212.23 3421.07,6163.91 3090.55,6163.91 ccw(c3090.65,6154.07) 3090.55,6144.22 ; 3090.55,6392.26 3421.07,6392.26 3469.39,6343.94 ccw(c3476.35,6350.9) 3476.35,6341.06 3716.45,6341.06 ccw(c3716.45,6350.9) 3723.41,6343.94 3782.51,6403.04 ccw(c3775.55,6410) 3785.39,6410 3785.39,6508.4 ccw(c3775.55,6508.3) 3765.71,6508.4 3765.71,6414.08 3712.37,6360.74 3480.43,6360.74 3432.11,6409.06 ccw(c3425.15,6402.1) 3425.15,6411.94 3090.55,6411.94 ccw(c3090.65,6402.1) 3090.55,6392.26 ; 3090.55,6841.07 3425.15,6841.07 ccw(c3425.15,6850.92) 3432.11,6843.96 3480.43,6892.27 3713.73,6892.27 3824.8,6825.67 3824.8,6717.07 ccw(c3834.64,6717.07) 3844.49,6717.07 3844.49,6831.25 ccw(c3834.64,6831.25) 3839.71,6839.69 3721.51,6910.56 ccw(c3716.45,6902.12) 3716.45,6911.96 3476.35,6911.96 ccw(c3476.35,6902.12) 3469.39,6909.08 3421.07,6860.76 3090.55,6860.76 ccw(c3090.65,6850.92) 3090.55,6841.07 ; 3090.55,7089.1 3421.07,7089.1 3469.39,7040.79 ccw(c3476.35,7047.75) 3476.35,7037.9 3716.45,7037.9 ccw(c3716.45,7047.75) 3723.41,7040.79 3782.51,7099.89 ccw(c3775.55,7106.85) 3785.39,7106.85 3785.39,7205.25 ccw(c3775.55,7205.15) 3765.71,7205.25 3765.71,7110.92 3712.37,7057.59 3480.43,7057.59 3432.11,7105.91 ccw(c3425.15,7098.95) 3425.15,7108.79 3090.55,7108.79 ccw(c3090.65,7098.95) 3090.55,7089.1 ; 3098.12,3734.78 3909.14,3732.81 ccw(c3909.19,3752.5) 3909.24,3772.18 3098.22,3774.15 ccw(c3098.17,3754.47) 3098.12,3734.78